# Altium PCB Game_Consol.PcbDoc
Units mil, origin at the board's own origin, x right, y up, seen from the top; angles counter-clockwise.
Board outline 3090.55 x 1732.28 mil, 2 copper layers (Top Layer, Bottom Layer); 54 components, 43 nets, 216 pads, 59 vias.
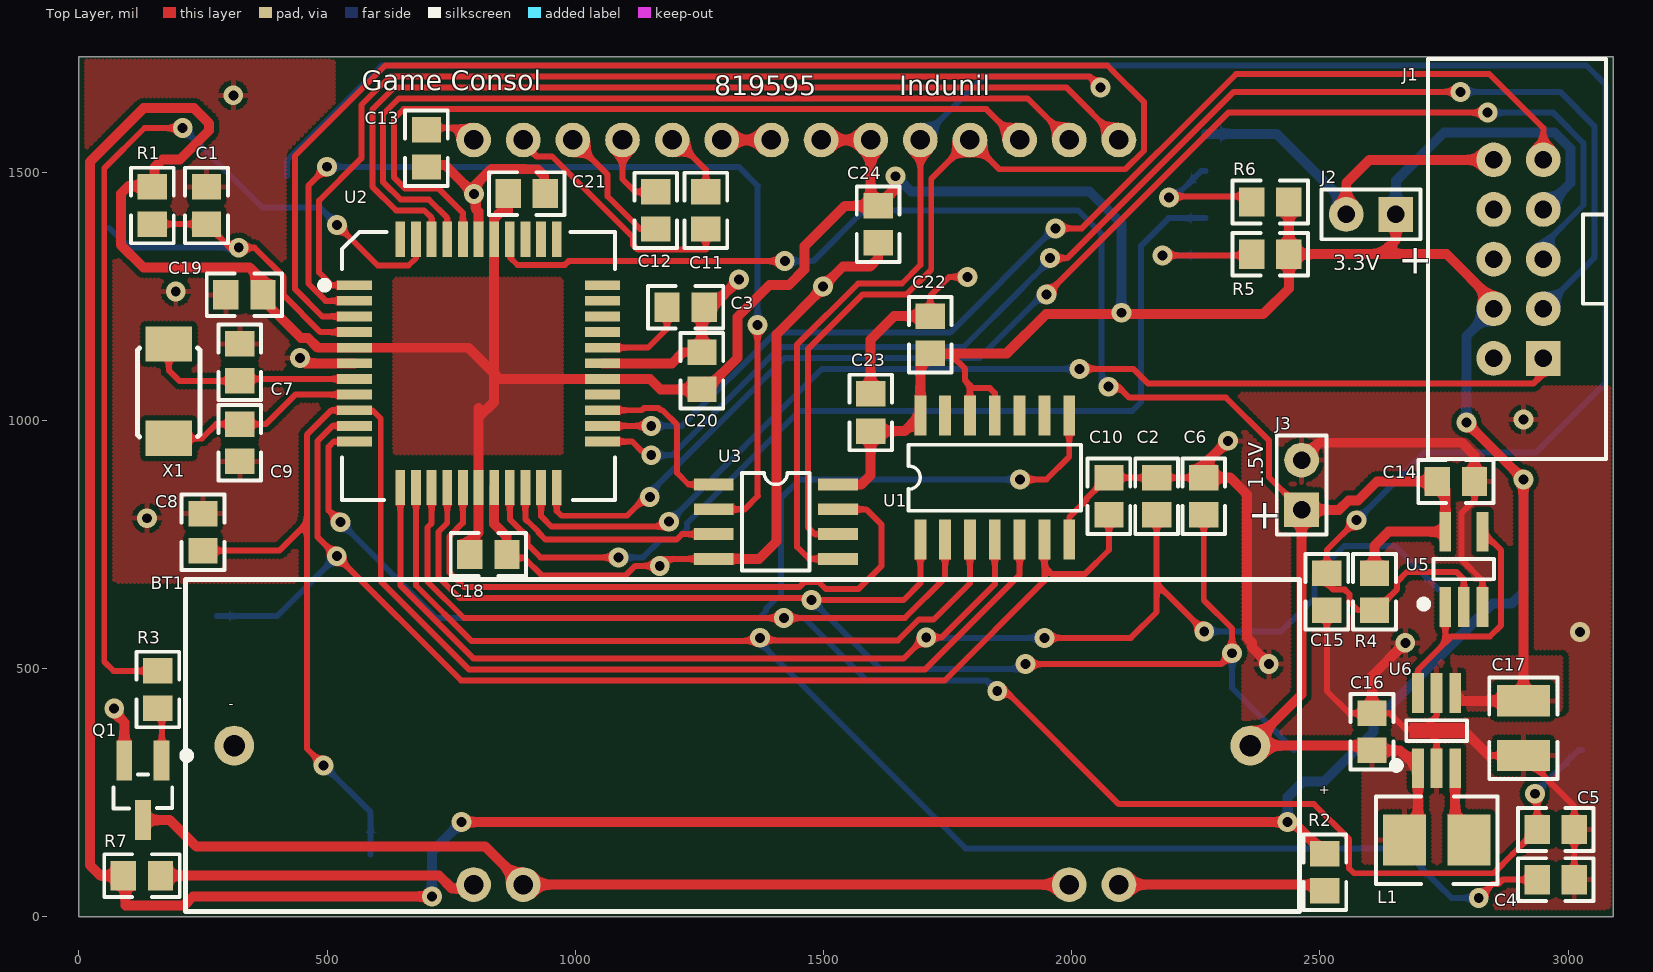
[diagram p0: Top Layer view]
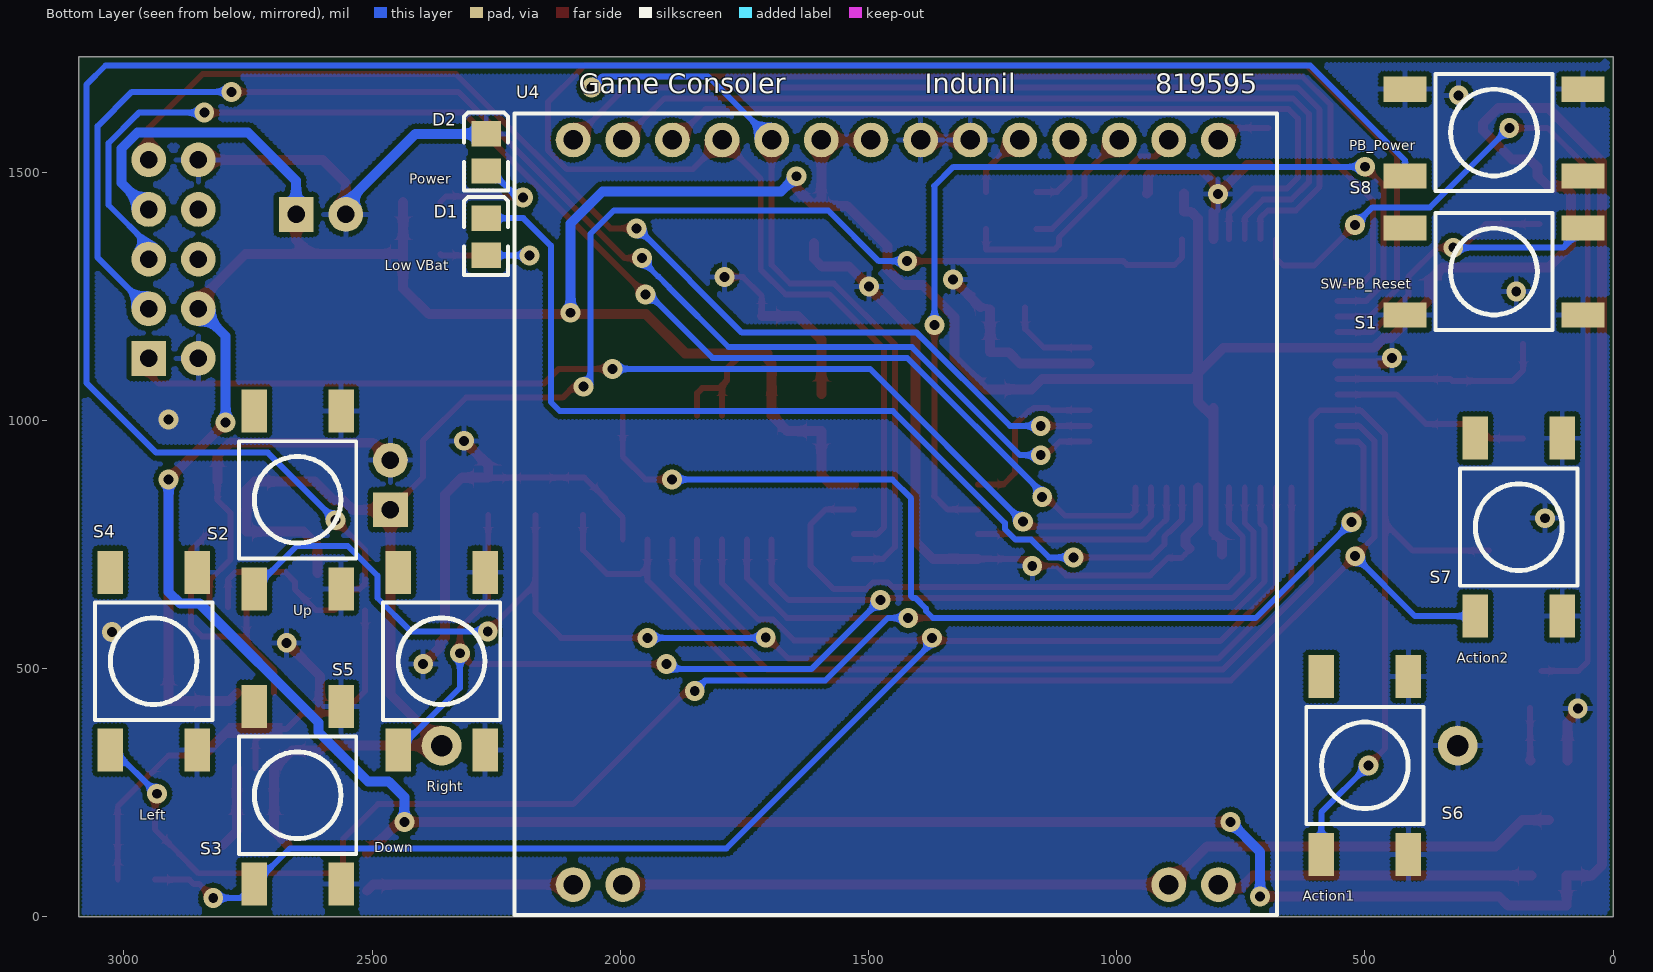
[diagram p1: Bottom Layer view, seen from below]
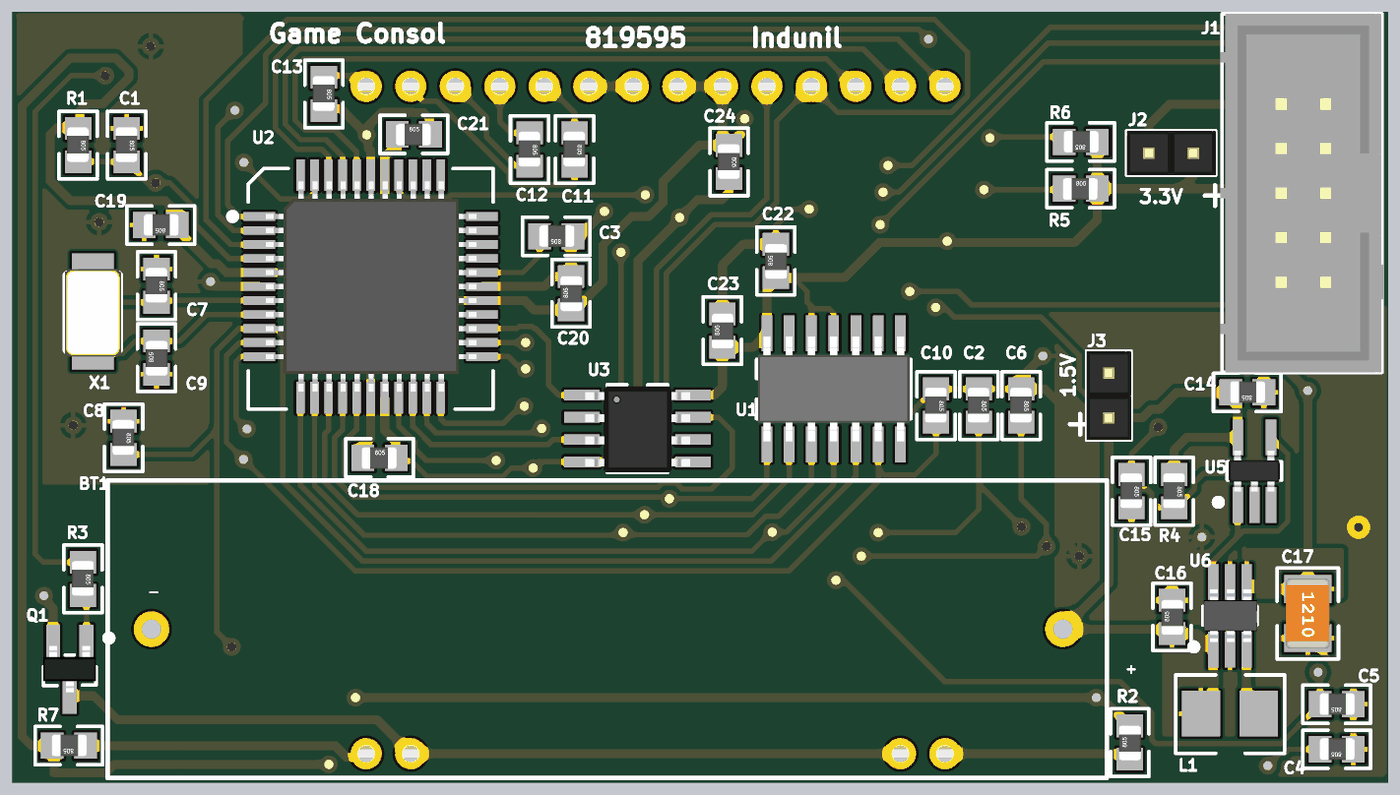
[diagram p2: 3D render of the assembled board from above, using the file's embedded part models]
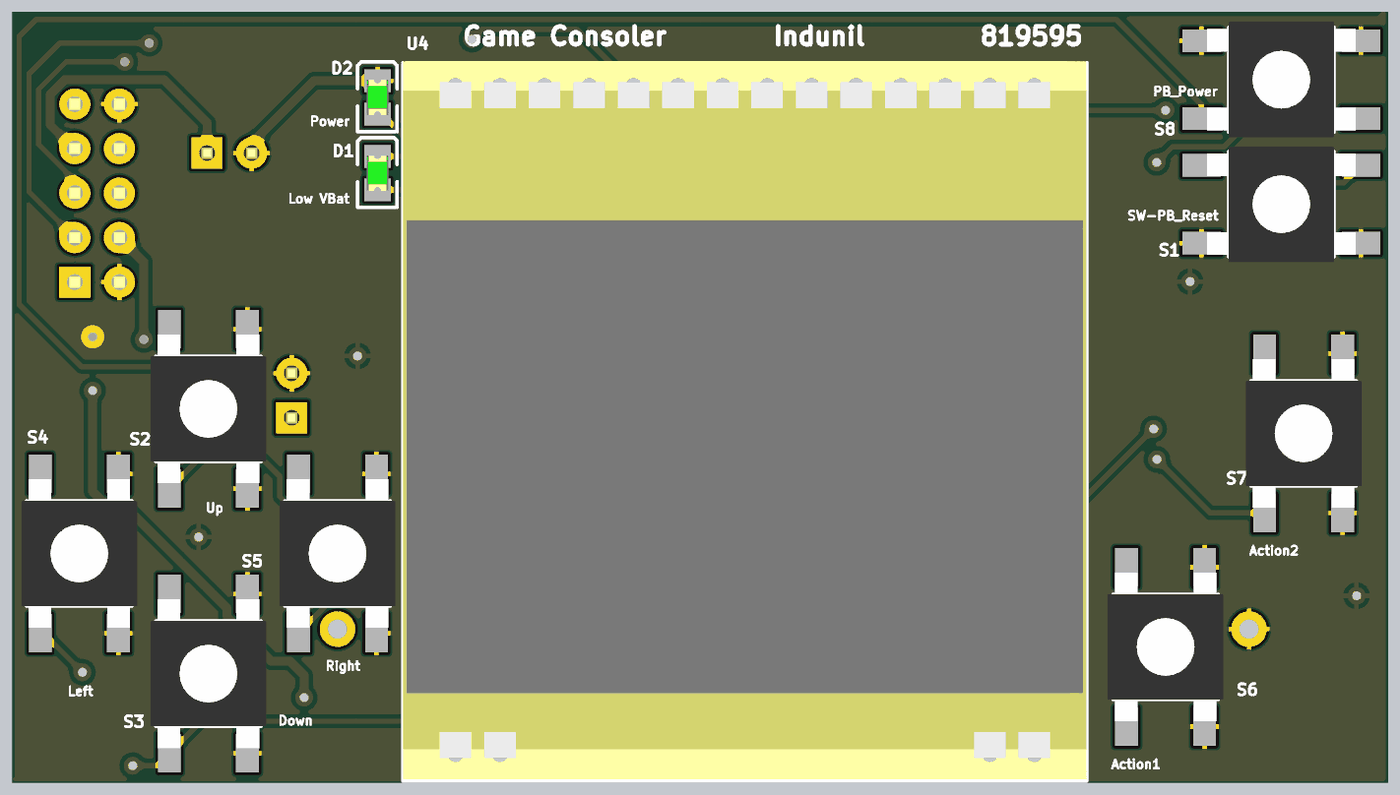
[diagram p3: 3D render of the assembled board from below, using the file's embedded part models]

## Layer stack, top to bottom
Top Solder: solder mask 0.4, Solder Resist, Dk 3.5
Top Layer: signal copper 1.4
Dielectric1: dielectric 12.6, FR-4, Dk 4.8
Bottom Layer: signal copper 1.4
Bottom Solder: solder mask 0.4, Solder Resist, Dk 3.5

## Board outline
0,0 0,1732.28 3090.55,1732.28 3090.55,0

## Design rules (kind name [scope] priority, off if disabled: settings)
Clearance [All] p1: gap=10 ignorepadtopadclearanceinfootprint=FALSE except(0: Arc-Hole Track-Hole SMDPad-Hole THPad-Hole Via-Hole Fill-Hole Poly-Hole Region-Hole Text-Hole)
ComponentClearance [All] p1 off: gap=10 collisioncheckmode=3 verticalgap=10 showdistances=FALSE
DiffPairsRouting [All] p1: maxlimit=20 minlimit=10 mostfreqgap=10 toplayer_minwidth=15 toplayer_maxwidth=15 toplayer_prefwidth=15 bottomlayer_minwidth=15 bottomlayer_maxwidth=15 bottomlayer_prefwidth=15 maxuncoupledlength=500
FabricationTestPointUsage TestPointUsage [All] p1: valid=0 allowmultiple=FALSE
FabricationTestpoint Testpoint [All] p1: side=3 testpointundercomponent=TRUE minsize=40 maxsize=100 preferedsize=60 minholesize=0 maxholesize=40 preferedholesize=32 testpointgrid=1 allowsidetop=TRUE allowsidebottom=TRUE usegrid=TRUE gridtolerance=0.01
Height [All] p1: minheight=0 maxheight=7874.02 prefheight=500
HoleSize [All] p1: absolutevalues=TRUE maxlimit=199 minlimit=15 maxpercent=80.000 minpercent=20.000
MinimumAnnularRing [All] p1: minimumring=5
PolygonConnect [All] p1: connectstyle=Relief reliefconductorwidth=10 reliefentries=4 polygonreliefangle="90 Angle" airgapwidth=10
RoutingVias [All] p1: holewidth=20 width=40 viastyle="Through Hole" minholewidth=15 minwidth=25 maxholewidth=80 maxwidth=100
SilkToSolderMaskClearance SilkscreenOverComponentPads [IsPad] p1: minsilkscreentomaskgap=10 clearancetoexposedcopper=TRUE
SolderMaskExpansion [All] p1: expansion=6
UnRoutedNet [All] p1: checkbadconnections=TRUE
Width WidthVcc [InNet('VCC 3.3V')] p1: maxlimit=20 minlimit=10 preferedwidth=20
Width [All] p2: maxlimit=20 minlimit=10 preferedwidth=12
22 further rules are at their usual default settings.

## Classes and differential pairs
component class Game_Consol_Top: C1 C2 C3 C4 C5 C6 C7 C8 C9 C10 C11 C12 C13 J1 Q1 R1 R2 R3 R7 S1 S2 S3 S4 S5 S6 S7 U1 U2 U3 U4 X1
component class Game_Consol_Power: BT1 C14 C15 C16 C17 C18 C19 C20 C21 C22 C23 C24 D1 D2 J2 J3 L1 R4 R5 R6 S8 U5 U6

## Components (designator, comment, footprint, x,y, rotation, side; value= is the part's Value field where it differs from the comment)
BT1 "Battery" BATT_HOLDER 1336.38,345 r0 top locked
C1 "100nF" 0805 257,1433 r270 top
C2 "100nF" 0805 2171,847.4 r270 top
C3 "100nF" 0805 1222,1228 r180 top
C4 "100nF" 0805 2975,75 r180 top
C5 "100nF" 0805 2975,176 r180 top
C6 "100nF" 0805 2266,847.4 r270 top
C7 "18pF" 0805 324,1117 r270 top
C8 "100nF" 0805 250,775 r270 top
C9 "18pF" 0805 324,955 r90 top
C10 "100nF" 0805 2075,847.4 r270 top
C11 "1uF" 0805 1263,1423 r270 top
C12 "1uF" 0805 1162,1423 r270 top
C13 "1uF" 0805 700,1548 r270 top
C14 "100nF" 0805 2774.02,877 r180 top
C15 "100nF" 0805 2514,655 r270 top
C16 "1uF" 0805 2605,372.6 r90 top
C17 "22uF" 1210 2910,380 r270 top
C18 "100nF" 0805 825,730 r0 top
C19 "100nF" 0805 333.4,1253 r180 top
C20 "100nF" 0805 1255,1100 r90 top
C21 "100nF" 0805 902,1457 r0 top
C22 "100nF" 0805 1715,1172.6 r90 top
C23 "100nF" 0805 1595,1016 r90 top
C24 "100nF" 0805 1610,1395 r270 top
D1 "Low VBat" 0805D 2270,1370 r270 bottom locked
D2 "Power" 0805D 2270,1540 r270 bottom locked
J1 "JTAG" BOXEDVERT10 2950,1125 r90 top locked
J2 "3.3V" HDR1X2 2653,1415 r180 top
J3 "1.5V" HDR1X2 2463,820 r90 top
L1 "4.7uH" 1210L 2735,155 r180 top
Q1 "RTR025N03TL" SOT23 129,255 r270 top
R1 "10k" 0805 148,1433 r270 top
R2 "15R" 0805 2510,90 r90 top
R3 "15R" 0805 159,458 r270 top
R4 "10k" 0805 2610,655 r270 top
R5 "1k" 0805 2400,1335 r0 top
R6 "1k" 0805 2400,1440 r180 top
R7 "15R" 0805 127,83 r180 top
S1 "SW-PB_Reset" SPNO_SMD 240,1300 r180 bottom locked
S2 "Up" SPNO_SMD 2649.99,840 r90 bottom locked
S3 "Down" SPNO_SMD 2649.99,245 r90 bottom locked
S4 "Left" SPNO_SMD 2939.99,515 r90 bottom locked
S5 "Right" SPNO_SMD 2359.99,515 r90 bottom locked
S6 "Action1" SPNO_SMD 499.99,305 r90 bottom locked
S7 "Action2" SPNO_SMD 189.99,785 r90 bottom locked
S8 "PB_Power" SPNO_SMD 240,1580 r0 bottom locked
U1 "74AHC30" SOIC-14 1845,885 r90 top
U2 "ATMEGA16" QFP-48 805,1115 r0 top locked
U3 "FM25L04B" SOIC-8 1404,796 r0 top
U4 "EA DOGS102x-6" "EA DOGS102x" 1445,815 r180 bottom locked
U5 "74AUG1G80" SOT23-5 2790,700 r90 top
U6 "SC120" SOT23-6 2735,375 r90 top
X1 "7.68Mhz" XTAL_FLAT_SMD 181,1059 r90 top

## Footprints (in the part's own frame and the unit in brackets; to place one, negate y for a bottom-side part, rotate by r counter-clockwise, add the part's x,y. Pads: shape width x height; smd on the part's side, far side on the other; paste and mask are expansions set on the pad)
0805 [mm] "0805 Footprint"
  rect 1.3x1.5 smd: 1(-0.95,0) 2(0.95,0)
  silkscreen extent -1.93,-1.09 1.93,1.09, body extent -1.03,-0.64 0.97,0.61, height 0.8
0805D [mm] "0805 Diode"
  rect 1.3x1.5 smd: A(0.95,0) K(-0.95,0)
  silkscreen extent -2.03,-1.14 1.95,1.12, body extent -1.01,-0.62 1.01,0.63, height 1.1
1210 [mm]
  rect 1.6x2.7 smd: 1(-1.4,0) 2(1.4,0)
  silkscreen extent -2.6,-1.75 2.6,1.75, body extent -2,-1.24 2,1.24, height 1.72
1210L [mm] "Precision Wire Wound Inductor, 2-Leads, Body 3.2x3.2mm, IPC Low Density"
  rect 2.2x2.6 smd: 1(-1.651,0) 2(1.651,0)
  silkscreen extent -3.12,-2.21 3.1,2.26, body extent -1.75,-1.75 1.75,1.75, height 2.2
BATT_HOLDER [mil]
  round 80 hole 43.31: 1(1023.62,0) 2(-1023.62,0)
  silkscreen extent -1122,-335 1122,335
BOXEDVERT10 [mil] "IDC Header 2.54mm Boxed 10 pins"
  rect 70x70 hole 35.43: 1(0,0)
  round 70 hole 35.43: 2(0,100) 3(100,0) 4(100,100) 5(200,0) 6(200,100) 7(300,0) 8(300,100) 9(400,0) 10(400,100)
  silkscreen extent -203,-127 603,232, body extent -204,-129 604,237, height 359
"EA DOGS102x" [mil] "graphics display footprint"
  round 70 hole 39.37: 1(-650,-750) 2(-550,-750) 13(550,-750) 14(650,-750) 15(650,750) 16(550,750) 17(450,750) 18(350,750) 19(250,750) 20(150,750) 21(50,750) 22(-50,750) 23(-150,750) 24(-250,750) 25(-350,750) 26(-450,750) 27(-550,750) 28(-650,750)
  silkscreen extent -768,-811 768,803, body extent -768,-807 768,807, height 213
HDR1X2 [mil] "Connector; Header; 2 Position"
  rect 70x70 hole 35.43: 1(0,0)
  round 70 hole 35.43: 2(100,0)
  silkscreen extent -50,-50 150,50, body extent -50,-50 150,50, height 333
QFP-48 [mm]
  rect 1.8x0.5 smd: 1(-6.35,4) 2(-6.35,3.2) 3(-6.35,2.4) 4(-6.35,1.6) 5(-6.35,0.8) 6(-6.35,0) 7(-6.35,-0.8) 8(-6.35,-1.6) 9(-6.35,-2.4) 10(-6.35,-3.2) 11(-6.35,-4) 23(6.35,-4) 24(6.35,-3.2) 25(6.35,-2.4) 26(6.35,-1.6) 27(6.35,-0.8) 28(6.35,0) 29(6.35,0.8) 30(6.35,1.6) 31(6.35,2.4) 32(6.35,3.2) 33(6.35,4)
  rect 0.5x1.8 smd: 12(-4,-6.35) 13(-3.2,-6.35) 14(-2.4,-6.35) 15(-1.6,-6.35) 16(-0.8,-6.35) 17(0,-6.35) 18(0.8,-6.35) 19(1.6,-6.35) 20(2.4,-6.35) 21(3.2,-6.35) 22(4,-6.35) 34(4,6.35) 35(3.2,6.35) 36(2.4,6.35) 37(1.6,6.35) 38(0.8,6.35) 39(0,6.35) 40(-0.8,6.35) 41(-1.6,6.35) 42(-2.4,6.35) 43(-3.2,6.35) 44(-4,6.35)
  silkscreen extent -8,-6.98 6.98,6.73, body extent -5.97,-6 6.03,6, height 1.13
SOIC-8 [mil] "SOIC-8 Footprint"
  rect 80x24 smd: 1(-125,75) 2(-125,25) 3(-125,-25) 4(-125,-75) 5(125,-75) 6(125,-25) 7(125,25) 8(125,75)
  silkscreen extent -68,-98 68,98, body extent -117,-98 119,94, height 67
SOIC-14 [mil] "SOIC-14 Footprint"
  rect 80x24 smd: 1(-125,150) 2(-125,100) 3(-125,50) 4(-125,0) 5(-125,-50) 6(-125,-100) 7(-125,-150)
  rect 80x24.02 smd: 8(125,-150) 9(125,-100) 10(125,-50) 11(125,0) 12(125,50) 13(125,100) 14(125,150)
  silkscreen extent -67,-173 66,173, body extent -118,-170 118,170, height 61
SOT23 [mil] "SOT23, 3-Leads, Body 3.0x2.5mm (max), Pitch 0.95mm, IPC Low Density"
  rect 80.24x31.5 smd: 1(-60,37.4)
  rect 80x31.5 smd: 2(-60,-37.4) 3(60,0)
  silkscreen extent -75,-59 37,93, body extent -52,-59 52,59, height 43
SOT23-5 [mm]
  rect 2.032x0.6 smd: 1(-1.929,0.95) 2(-1.929,0) 3(-1.929,-0.95) 4(1.929,-0.95) 5(1.929,0.95)
  silkscreen extent -1.9,-1.55 0.53,2.18, body extent -1.17,-1.46 1.17,1.46, height 1.02
SOT23-6 [mm]
  rect 2.032x0.6 smd: 1(-1.929,0.95) 2(-1.929,0) 3(-1.929,-0.95) 4(1.929,-0.95) 5(1.929,0) 6(1.929,0.95)
  silkscreen extent -1.9,-1.55 0.53,2.18, body extent -1.5,-1.56 1.5,1.49, height 1.42
SPNO_SMD [mm] "SP NO SMD Tactile switch"
  rect 2.2x1.3 smd: 1(-4.55,-2.225) 2(4.55,-2.225) 3(-4.55,2.225) 4(4.55,2.225)
  silkscreen extent -3,-3 3,3, body extent -4.25,-3.3 4.25,3.3, height 4.32
XTAL_FLAT_SMD [mm]
  rect 1.8x2.4 smd: 1(-2.412,0) 2(2.412,0)
  silkscreen extent -2.33,-1.59 2.21,1.6, body extent -2.58,-1.6 2.42,1.6, height 1.02

## Part data
BT1: "Multicell Battery", LatestRevisionDate=17-Jul-2002, LatestRevisionNote="Re-released for DXP Platform.", PackageDescription="Battery; 2 Leads", PackageReference=BAT-2, Published=24-Mar-1999, Publisher="Altium Limited"
C1 C2 C3 C4 C5 C6 C7 C8 C9 C10 C11 C12 C13 C14 C15 C16 C18 C19 C20 C21 C22 C23 C24: library part "C 0805", "Capacitor 100nF", Class I=Passive, Revision="July-2002: Re-released for DXP Platform."
C17: library part "C 1210", "Capacitor 22uF", Capacitance=22µF, Manufacturer="Generic Components", Manufacturer Part Number=LMK316F226ZL-T, Operating Temperature="-30°C ~ 85°C", Package / Case="1206 (3216 Metric)", Ratings=-, Supplier Part Number 1=587-1356-1-ND, Temperature Coefficient="Y5V (F)", Tolerance="-20%, +80%", Voltage - Rated=10V, Applications="General Purpose", Category=Capacitors, Class I=Passive, Class II=Capacitor, ComponentLink1Description=http://www.yuden.co.jp/or/product/category/capacitor/LMK316F226ZL-T.pdf, ComponentLink1URL=http://www.yuden.co.jp/or/product/category/capacitor/LMK316F226ZL-T.pdf, Features=-, Height - Seated (Max)=-, Lead Spacing=-, Lead Style=-, Mounting Type="Surface Mount, MLCC", Packaging="Cut Tape (CT)", Pricing 1="1=0.3, 10=0.254, 50=0.143, 100=0.1271, 250=0.09532, 500=0.08418, 1000=0.07465 (AUD)", Published=8-Jun-2000, Publisher="Altium Limited", Revision="July-2002: Re-released for DXP Platform.", RoHS="RoHS Compliant", Size / Dimension="0.126\" L x 0.063\" W (3.20mm x 1.60mm)", Stock 1=33004, Supplier 1=Digi-Key, Thickness (Max)="0.071\" (1.80mm)"
D1: library part "LED RED", "Light Emitting Diode", Manufacturer="Generic Components", Class I=Discrete, Class II="Diode - Switching", Published=8-Jun-2000, Publisher="Altium Limited", Revision="July-2002: Re-released for DXP Platform."
D2: library part "LED GREEN", "Light Emitting Diode", Manufacturer="Generic Components", Class I=Discrete, Class II="Diode - Switching", Published=8-Jun-2000, Publisher="Altium Limited", Revision="July-2002: Re-released for DXP Platform."
J1: library part JTAG_CON, "JTAG ATMEL connector"
J2 J3: library part HDR2, "2 Pin Header", LatestRevisionDate=17-Jul-2002, LatestRevisionNote="Re-released for DXP Platform.", Publisher="Altium Limited"
L1: library part "I 1210", "Inductor 4.7uH", Current=450mA, Current - Saturation=-, DC Resistance (DCR)="260 mOhm Max", Frequency - Self Resonant=43MHz, Frequency - Test=1MHz, Inductance=4.7µH, Manufacturer="Murata Electronics North America", Manufacturer Part Number=LQH32CN4R7M23L, Operating Temperature="-40°C ~ 85°C", Package / Case="1210 (3225 Metric)", Supplier Part Number 1=490-2495-1-ND, Tolerance=±20%, Applications="Power Supplies", Category="Inductors, Coils, Chokes", Class II=Inductor, Code_IEC=1005, Code_JEITA=0402, ComponentLink1Description=http://search.murata.co.jp/Ceramy/image/img/PDF/ENG/L0075S0093LQH32C_23~33.pdf, ComponentLink1URL=http://search.murata.co.jp/Ceramy/image/img/PDF/ENG/L0075S0093LQH32C_23~33.pdf, Current - Temperature Rise=-, LatestRevisionDate=17-Jul-2002, LatestRevisionNote="Re-released for DXP Platform.", Material - Core=Ferrite, Mounting Type="Surface Mount", PackageReference=0402-A, Packaging="Cut Tape (CT)", Pricing 1="1=0.34, 10=0.313, 25=0.2784, 50=0.2436, 100=0.2261, 250=0.20868, 500=0.19824, 750=0.18084, 1000=0.15998 (AUD)", Published=8-Jun-2000, Publisher="Altium Limited", Q @ Freq=-, RoHS="RoHS Compliant", Shielding=Unshielded, Stock 1=31057, Supplier 1=Digi-Key, Type="Ferrite Core"
Q1: library part MOSFET-N, "N-Channel MOSFET", PackageDocument=1995/1996, LatestRevisionDate=17-Jul-2002, LatestRevisionNote="Re-released for DXP Platform.", PackageReference=E3, Published=8-Jun-2000, Publisher="Altium Limited"
R1 R2 R3 R4 R5 R6 R7: library part R, "Resistor"
S1 S2 S3 S4 S5 S6 S7 S8: library part SW-PB, "Push Button Switch", Contact Rating @ Voltage="0.05A @ 12VDC", Manufacturer="TE Connectivity", Manufacturer Part Number=FSM4JSMA, Operating Force=160gf, Supplier Part Number 1=450-1129-ND, Actuator Orientation="Top Actuated", Actuator Type=Standard, Category=Switches, Circuit=SPST-NO, ComponentLink1Description=http://documents.tycoelectronics.com/commerce/DocumentDelivery/DDEController?Action=srchrtrv&DocNm=2-1437565-7&DocType=CD&DocLang=EN, ComponentLink1URL=http://documents.tycoelectronics.com/commerce/DocumentDelivery/DDEController?Action=srchrtrv&DocNm=2-1437565-7&DocType=CD&DocLang=EN, Illumination=Non-Illuminated, LatestRevisionDate=17-Jul-2002, LatestRevisionNote="Re-released for DXP Platform.", Mounting Type="Surface Mount", Outline="6.00mm x 6.00mm", PackageDescription="Switch; 2 Leads", PackageReference=SPST-2, Packaging=Bulk, Pricing 1="1=0.28, 10=0.265, 25=0.2256, 50=0.1974, 100=0.1834, 250=0.1622, 500=0.15516, 1000=0.12694, 5000=0.10579 (AUD)", Published=24-Mar-1999, Publisher="Altium Limited", RoHS="RoHS Compliant", Stock 1=30338, Supplier 1=Digi-Key, Switch Function=Off-Mom, Termination Style="Gull Wing"
U1: "1 x 8 Input NAND gate"
U2: "ATMEGA16 Microcontroller"
U3: "FRAM 4Kb Memory"
U4: "LCD 102x64-pixel with backlight"
U5: "Inverted single D flip flop"
U6: "Regulator Low Voltage"
X1: library part XTAL, "Crystal Oscillator", Digikey=535-9103-1-ND, Revision="July-2002: Re-released for DXP Platform."

## Via types
v1: diameter 40, hole 20, Top Layer to Bottom Layer, tented both sides, 57 vias
v2: diameter 40, hole 20, Top Layer to Bottom Layer, 2 vias

## Nets (pads, with @x,y where several pads share a name; then routed paths per layer and width w, separated by ;. In a path a pad name is that pad's centre, name@x,y a point inside that pad or via, vN(x,y) a via of type N, cw(c..) or ccw(c..) an arc to the next point about the centre after c; other vN are vias at no path point)
BackLED: R3.1 U2.43 | length 1915.8
  Top Layer w12: R3.1@144.4,495.4 69.6,495.4 51.01,513.99 51.01,1508.01 132.01,1589.01 v1(209,1589.01) ; v1(520,1394) 602,1312 664,1312 679.02,1327.02 U2.43
  Bottom Layer w12: v1(209,1589.01) 369.01,1429 369.2,1429.19 484.81,1429.19 v1(520,1394)
C1-: Q1.3 U4.2 U4.13 | length 1919.8
  Top Layer w20: Q1.3 183,195 236.47,141.53 818.47,141.53 U4.13 U4.2
CD: U2.40 U4.26 | length 1654.3
  Top Layer w12: U2.40 773.5,1418.08 724.59,1467 657.23,1467 635,1489.23 635,1608.15 653.85,1626.99 1828.01,1626.99 1880,1575 1895,1575 U4.26
  Bottom Layer w12: U4.26@1895,1550 U4.26
CS0_LCD: U2.42 U4.28 | length 1910.4
  Top Layer w12: U2.42 710.51,1407.99 695.5,1423 639,1423 591,1471 591,1626.37 635.62,1670.99 1989.01,1670.99 U4.28
CS1_RAM: U2.25 U3.1 | length 346.5
  Top Layer w12: U2.25 1133.57,1020.51 1138.07,1025.02 1167.9,1025.02 1172.4,1020.51 1175.49,1020.51 1205,991 1205,894 1228,871 U3.1
GND: BT1.2 C1.1 C2.1 C3.1 C4.1 C5.1 C6.1 C7.1 C8.1 C9.1 C10.1 C13.2 C14.1 C15.2 C16.2 C17.2 C18.2 C19.2 C20.2 C21.2 C22.2 C23.2 C24.2 D2.K J1.2 J1.10 J2.2 J3.2 Q1.2 S1.1 S1.2 S2.1 S2.2 S3.1 S3.2 S4.1 S4.2 S5.1 S5.2 S6.1 S6.2 S7.1 S7.2 S8.1 S8.2 U1.7 U2.6 U2.18 U2.28 U2.39 U3.4 U4.20 U4.21 U5.3 U6.2 U6.5 | length 6621.7
  Top Layer w12: C18.2@853,742 853,739.4 C18.2 869.4,723 897,723 932,688 1101.91,688 1120.91,707 v1(1170,707) 1184,721 U3.4 ; C3.1@1255,1223.6 C3.1 C3.1@1274,1228 ; C22.2 1715,1251 1753,1289 v1(1790,1289) ; U1.7 1995,804.8 2029.47,839.28 2029.47,842.22 2072.06,884.8 C10.1 C2.1 C6.1 ; C15.2 2514,455 2559,410 C16.2 2641,410 2673,378 2708,378 2710,380 ; U6.2 2735,355 2710,380 ; U6.5 2735,405 2710,380 ; 2785,380 2710,380 ; C14.1 2811.42,839.42 2785,813 2785,720 2827.4,677.6 U5.3 ; 2840.12,324.88 C17.2 3012.4,222.48 C5.1 C4.1
  Top Layer w20: v1(71,420) 67,416 91.6,391.4 Q1.2 ; v1(445,1126) 456,1115 U2.6 ; C13.2@694,1514.6 737.4,1514.6 v1(796,1456) ; U2.39 805,1420.5 799.5,1425.99 799.5,1458.5 797.01,1456 v1(796,1456) ; U2.18 836.5,791.5 861,767 861,750 C18.2@853,742 ; C21.2 937,1459.4 937,1493 924,1506 899,1506 898.47,1506.53 830.72,1506.53 796,1471.8 v1(796,1456) ; U2.28 1194.6,1115 1217,1137.4 C20.2 C3.1@1255,1223.6 ; C3.1@1274,1228 v1(1330,1284) ; U3.4 1370,721 1405,756 1405,1173.43 1499,1267.43 v1(1499,1270) 1539,1310 1594,1310 1610,1326 C24.2 ; U4.20 U4.21 ; C23.2 1595,1163 1642,1210 C22.2 ; v1(2315,959) 2266,910 C6.1 2319.2,884.8 2353,851 2353,562.29 2363,552.29 2363,543 v1(2397,509) ; J3.2 2498,955 2786,955 2811.42,929.58 C14.1 ; J2.2@2575,1415 2553,1437 2553,1478 2600,1525 J1.10 ; C16.2 2605,485 v1(2672,552) ; 2785,380 2840.12,324.88
  Bottom Layer w20: D2.K 2412.6,1577.4 2553,1437 J2.2
  other v1: 137,803 195,1260 311,1655
  other v2: 3024,574 2910,1002
Hold: U2.16 U3.7 | length 1279.1
  Top Layer w12: U2.16 773.5,793.65 746.01,766.15 746.01,693.85 775.85,664 1451.09,664 1461.09,674 1490.91,674 1504.91,660 1570,660 1617,707 1617,790 1586,821 U3.7
LED_LP: D1.K U2.19 | length 1981.9
  Top Layer w12: U2.19 867.99,800.9 893.36,775.53 894.62,775.53 903.99,766.15 903.99,750.01 930,724 v1(1087,724)
  Bottom Layer w12: v1(1087,724) 1136.09,724 1172.09,760 1203.91,760 1225,781.09 1225,793 1451,1019 2121.91,1019 2140,1037.09 2140,1352 2195.4,1407.4 D1.K
MISO: U2.2 U3.2 | length 1967.4
  Top Layer w12: v1(500,1511) 462,1473 462,1276 497.02,1240.98 U2.2 ; U3.2 1341,821 1368,848 1367,849 v1(1367,1192)
  Bottom Layer w12: v1(500,1511) 1329,1511 1368,1472 1367,1471 v1(1367,1192)
NetC3_2: C3.2 U2.29 | length 188.8
  Top Layer w12: U2.29 1146.5,1146.5 1184.6,1184.6 C3.2
NetC11_1: C11.1 U4.19 | length 137.5
  Top Layer w12: U4.19 1203,1565 1263,1505 C11.1
NetC11_2: C11.2 U4.16 | length 513.5
  Top Layer w12: U4.16 895,1559 922,1532 953,1532 1116.47,1368.53 1116.47,1353.38 1125.84,1344.01 1263,1344.01 C11.2
NetC12_1: C12.1 U4.18 | length 156.6
  Top Layer w12: U4.18 1095,1486 1120.6,1460.4 C12.1
NetC12_2: C12.2 U4.17 | length 267
  Top Layer w12: U4.17 1065,1495 1065,1451.11 1130.51,1385.6 C12.2
NetC13_1: C13.1 U4.15 | length 111.1
  Top Layer w12: C13.1@694,1589.4 770.6,1589.4 U4.15
NetC15_1: C15.1 R4.2 S8.4 U5.2 | length 4562
  Top Layer w12: v1(2574,799) 2514,739 C15.1 2514,672 2526.81,659.19 2550.16,659.19 2559.53,649.82 2559.53,634.47 2576.4,617.6 R4.2 2612.94,617.6 2655.53,660.18 2655.53,675 2675.53,695 2775,695 2790,680 U5.2
  Bottom Layer w12: S8.4 419.13,1524.13 610,1715 3037,1715 3075,1677 3075,1075 2935,935 2710,935 v1(2574,799)
NetD1_A: D1.A R5.1 | length 268.4
  Top Layer w12: v1(2182.6,1332.6) 2360.2,1332.6 R5.1
  Bottom Layer w12: v1(2182.6,1332.6) D1.A
NetD2_A: D2.A R6.2 | length 275
  Top Layer w12: v1@2192.4,1455 v1@2196,1451.4 ; v1(2196,1449) v1@2196,1451.4 ; R6.2 2351.2,1451.4 v1@2196,1451.4
  Bottom Layer w12: v1(2196,1449) 2207,1449 2260.6,1502.6 D2.A
NetL1_1: L1.1 U6.3 | length 165.5
  Top Layer w20: U6.3 2772.4,172.6 L1.1@2800,145
NetQ1_1: Q1.1 R3.2 | length 105.8
  Top Layer w12: Q1.1@167,315.6 R3.2@167,420.6
  Top Layer w20: Q1.1 Q1.1@167,315.6
NetR2_1: R2.1 U4.1 | length 420.1
  Top Layer w20: U4.1 2497.6,65 R2.1
NetR7_1: R7.1 U4.14 | length 645
  Top Layer w20: R7.1 725.57,83 751,57.57 751,57 787,57 U4.14
NetU5_1: U5.1 U5.4 U6.6 | length 526.9
  Top Layer w12: U6.6 2697.6,497.6 2752.6,552.6 ; U5.1 2752.6,552.6 ; U5.4 2865,738.33 2865,587.23 2842.77,565 2765,565 2752.6,552.6
PB_Action1: C8.2 S6.3 U1.5 U2.9 | length 3145.4
  Top Layer w12: C8.2 403.6,737.6 459,793 ; v1(493,305) 459,339 459,793 ; U1.5 1895,688.89 1704.11,498 786.29,498 608,676.29 608,1003.92 591.41,1020.51 U2.9 508.51,1020.51 459,971 459,793
  Bottom Layer w12: v1(493,305) 587.59,210.41 S6.3
PB_Action2: C10.2 S7.3 U1.6 U2.10 | length 2549
  Top Layer w12: U2.10 511.02,989.02 481,959 481,765 v1(519.5,726.5) 770,476 1744,476 1945,677 1945,705 ; U1.6 1945,705 ; C10.2 2075,739 2027,691 1959,691 1945,705
  Bottom Layer w12: S7.3 398.87,605.87 v1(519.5,726.5)
PB_Down: C4.2 S3.3 U1.3 U2.13 | length 3320.2
  Top Layer w12: U2.13 679.02,667.5 790.51,556 1365.91,556 v1@1366.96,557.04 ; v1(1372,562.09) v1@1366.96,557.04 ; U1.3 1795,672 1721.96,598.96 1721.91,599 1692.09,599 1650.13,557.04 v1@1366.96,557.04 ; v1(2820,38) 2847.82,65.82 2859.05,65.82 2868.23,75 C4.2
  Bottom Layer w12: v1@1359,563 1359.91,562.09 v1(1372,562.09) 1372,552 1786,138 2665.46,138 S3.3 2765.46,38 v1(2820,38)
PB_Int0: U1.8 U2.11 | length 2102.1
  Top Layer w12: v1(527,795) 503,819 503,947 513.52,957.52 U2.11 ; v1(1896,881) 1949,881 1995,927 U1.8
  Bottom Layer w12: v1(527,795) 720,602 1370,602 1384,616 1384,620.91 1405.09,642 1410,642 1414,646 1414,843 1452,881 v1(1896,881)
PB_Left: C5.2 S4.3 U1.2 U2.14 | length 3384.4
  Top Layer w12: U2.14 710.51,792.88 702.01,784.38 702.01,675.62 775.63,602 v1(1420,602) 1663.98,602 1745,683.02 U1.2 ; v1(1850,455) 1867,455 2095,227 2488.15,227 2559,156.15 2559,97.37 2568.55,87.82 2849.93,87.82 2888.59,126.47 2888.07,126.47 C5.2 2937.6,243.4 v1(2933,248)
  Bottom Layer w12: v1(1420,602) 1461.09,602 1587.09,476 1829,476 v1(1850,455) ; v1(2933,248) 3020.87,335.87 S4.3
PB_Reset: C1.2 R1.2 S1.4 U2.4 | length 796.5
  Top Layer w12: R1.2 C1.2 304.6,1348 v1(322,1348) 353.55,1348 412.39,1289.16 412.39,1251.94 486.35,1177.99 U2.4
  Bottom Layer w12: S1.4 100.46,1348 v1(322,1348)
PB_Right: C6.2 S5.3 U1.1 U2.15 | length 2747.3
  Top Layer w12: U2.15 742.01,793.27 724.01,775.27 724.01,684.73 766.74,642 1472,642 v1(1476,638) 1661,638 1695,672 U1.1 ; v1(1907,509) 2301,509 v1(2323,531) 2323,581 2266,638 C6.2
  Bottom Layer w12: v1(1476,638) 1615,499 1897,499 v1(1907,509) ; v1(2323,531) 2323,461.2 2447.59,336.6 S5.3
PB_Up: C2.2 S2.3 U1.4 U2.12 | length 3030.8
  Top Layer w12: U2.12 647.52,667.88 795.4,520 1661,520 v1@1707,566 ; v1(1707,563) 1738,563 1845,670 U1.4 ; v1(1945,562) 2119,562 2171,614 2171,671 ; C2.2 2171,671 ; v1(2267,575) 2171,671
  Bottom Layer w12: v1(1707,563) 1708,562 v1(1945,562) ; v1(2267,575) 2422,575 2489.18,642.18 2489.18,687.18 2549,747 2651.46,747 S2.3
RST_LCD: U2.41 U4.27 | length 1769
  Top Layer w12: U2.41 742.01,1407.99 705,1445 648.11,1445 613,1480.11 613,1617.26 644.73,1648.99 1911.01,1648.99 U4.27
SCK: U2.3 U3.6 U4.25 | length 3749.2
  Top Layer w12: U2.3 490.51,1209.49 435,1265 435,1532.6 617.39,1714.99 2071.99,1714.99 2083.98,1703 2146,1641 2146,1543.88 2108.12,1506 1854,1506 U4.25 1717,1487 1717,1303.89 1667.11,1253.99 1578.84,1253.99 1469,1144.15 1469,784 1482,771 U3.6
SDA: U2.1 U3.5 U4.24 | length 3467.7
  Top Layer w12: U2.1 509.52,1272.48 484,1298 484,1443 569,1528 569,1635.49 626.51,1692.99 2036.01,1692.99 v1(2058,1671) ; U3.5 1471,721 1447,745 1447,1153.26 1569.73,1275.99 1657.99,1275.99 1695,1313 U4.24
  Bottom Layer w12: U4.24 1823,1693 2036,1693 v1(2058,1671)
TCK: J1.1 U2.21 | length 2274
  Top Layer w12: U2.21 930.98,807.02 952,786 1179,786 v1(1189,796) ; v1@2011.12,1103.88 v1(2016,1103.88) 2016.12,1104 2124,1104 2154,1074 2930,1074 2950,1094 J1.1
  Bottom Layer w12: v1(1189,796) 1496.88,1103.88 v1(2016,1103.88)
TDI: J1.9 U2.24 | length 2297.9
  Top Layer w12: U2.24 v1(1152.98,989.02) ; v1(1967,1387) 2020.24,1387 2331.24,1698 2841.09,1698 2950,1589.09 J1.9
  Bottom Layer w12: v1(1152.98,989.02) 1214.93,989.02 1402.91,1177 1755.09,1177 1965.09,1387 v1(1967,1387)
TDO: J1.3 U2.23 | length 2755.3
  Top Layer w12: U2.23 1114.48,957.52 1134,938 1145,938 v1(1153,930) ; v1(1956,1327) 1991.35,1327 2326.35,1662 v1(2783,1662)
  Bottom Layer w12: v1(1153,930) 1194.89,930 1412.76,1147.88 1781.88,1147.88 1902,1268 1902,1268.91 1923.09,1290 1924,1290 1956,1322 v1(1956,1327) ; v1(2783,1662) 2984,1662 3053,1593 3053,1328 J1.3
TMS: J1.5 U2.22 | length 2753.8
  Top Layer w12: U2.22 962.48,817.52 972,808 1104,808 1142,846 v1(1150,846) ; v1(1949.46,1254) 2315.46,1620 v1(2838,1620)
  Bottom Layer w12: v1(1150,846) 1150,854 1421.88,1125.88 1813.88,1125.88 1942,1254 v1(1949.46,1254) ; v1(2838,1620) 2970,1620 2974,1616 2974,1615.55 3031,1558.55 3031,1433.88 2950,1352.88 J1.5
VBat: BT1.1 C14.2 C16.1 J3.1 L1.2 R4.1 U2.37 U5.5 U6.1 | length 3802.8
  Top Layer w12: U2.37 867.99,1328.59 883.59,1313 884.15,1313.57 978.95,1313.57 986.38,1321 v1(1422,1321) ; v1(2074,1068) 2094,1068 2116,1046 2310.91,1046 2397,959.91 2397,886 J3.1
  Top Layer w20: R4.1 2610,747.4 2638.53,775.93 U5.5 2752.6,861.02 C14.2 2615,877 2577,839 2557.43,839 2538.43,820 J3.1 2463,448 BT1.1 2595.2,345 C16.1 2661.47,335.2 U6.1 2697.6,172.6 L1.2@2670,145
  Bottom Layer w12: v1(1422,1321) 1479,1321 1581,1423 2013,1423 2060,1376 2060,1082 v1(2074,1068)
"VCC 3.3V": C17.1 C18.1 C19.1 C20.1 C21.1 C22.1 C23.1 C24.1 J1.4 J1.7 J2.1 R1.1 R2.2 R5.2 R6.1 R7.2 U1.11 U1.12 U1.14 U2.5 U2.17 U2.27 U2.38 U3.8 U4.22 U4.23 U6.4 | length 13248.2
  Top Layer w12: C22.1@1703.8,1135.2 1709.4,1129.6 1759.4,1129.6 1785.2,1103.8 1785.2,1080.8 1795,1071 ; U1.12 1795,1071 ; U1.11 1845,1055 1835,1065 1801,1065 1795,1071
  Top Layer w20: R7.2 43,83 22,104 22,1521 130.01,1629.01 231.56,1629.01 262,1598.57 262,1584.4 203.6,1526 168,1526 152,1510 152,1493 131,1472 100,1472 85,1457 85,1353 130,1308 344,1308 370.8,1281.2 C19.1 370.8,1242.43 447.23,1166 461.57,1166 481.07,1146.5 U2.5 784.5,1146.5 836.5,1094.5 ; R7.2@93.6,83 93.6,22.4 211.21,22.4 229.8,41 v1(711,41) ; v1(771,191) v1(2435,191) 2446.4,191 R2.2 ; C18.1 787.6,757 805,774.4 U2.17 805,1006 ; 805,1025 805,1006 ; C21.1 864.6,1420.43 849.87,1420.43 836.5,1407.06 U2.38 836.5,1094.5 ; U4.22 U4.23 1595,1447.4 C24.1 ; U3.8 1576,871 1595,890 C23.1 1663.6,978.6 U1.14 1695,1115.2 1709.4,1129.6 C22.1 ; v1(1645,1492) 1645,1467.4 C24.1 ; C22.1@1703.8,1135.2 C22.1 ; v1(2100,1217) v1@2108,1217 ; R6.1 R5.2 ; J2.1 2653,1364 2624,1335 ; U6.4 2788.21,435.12 C17.1 v1(2910,881) v1(2795,996) ; J1.4 2850,1240 2755,1335 2624,1335 ; 805,1006 836.5,1037.5 836.5,1094.5 ; 836.5,1094.5 847.49,1083.5 U2.27 1150.5,1083.5 1171.4,1062.6 C20.1 1263.6,1062.6 1327,1126 1327,1208.57 1391.43,1273 1430.57,1273 1462,1304.43 1462,1351 1543.4,1432.4 C24.1 ; C22.1 1869.2,1135.2 1948,1214 2385.66,1214 2437.4,1265.74 R5.2 ; R5.2 2624,1335
  Bottom Layer w20: v1(711,41) 711,131 v1(771,191) ; v1(1645,1492) 1676,1461 2036,1461 2100,1397 v1(2100,1217) ; v1(2435,191) 2435,241 2466.56,272.56 2508,272.56 2607.99,372.54 2607.99,391.71 2847.1,630.83 2886.27,630.83 2910,654.56 v1(2910,881) ; J2.1 2653,1483 2750,1580 2972.78,1580 3005,1547.78 3005,1478 2952,1425 J1.7 ; J2.1@2675,1415 J2.1@2675,1427.78 ; v1(2795,996) 2795,1170 J1.4
WP: U2.20 U3.3 | length 466.1
  Top Layer w12: U2.20 899.49,800.51 902.47,797.53 903.73,797.53 925.99,775.27 925.99,774.01 940,760 1203.91,760 1214.91,771 U3.3
XTAL1: C9.2 U2.8 X1.1 | length 410.4
  Top Layer w12: X1.1 248.02,964.02 276.4,992.4 C9.2 376.4,992.4 436.01,1052.01 U2.8
XTAL2: C7.2 U2.7 X1.2 | length 437.5
  Top Layer w12: X1.2 181,1101 202.4,1079.6 C7.2 327.91,1083.5 U2.7
pads on no net: J1.6 J1.8 S1.3 S2.4 S3.4 S4.4 S5.4 S6.4 S7.4 S8.3 U1.9 U1.10 U1.13 U2.26 U2.30 U2.31 U2.32 U2.33 U2.34 U2.35 U2.36 U2.44

## Polygon pours and split planes (outlines as drawn)
GND on Top Layer "GND_L01_P079" (hatched 90Degree grid 8 track 10, remove dead copper, pour order 79): 3082,1066 2317,1066 2315,1064 2346,1033 2346,18 3078,18 3082,22
VBat on Top Layer "VBAT_L01_P077" (hatched 90Degree grid 8 track 10, pour order 77): 2705,110 2704,109 2588,109 2588,333 2586,335 2586.2,335.2 2702.2,335.2 2704,337 2705,336
"VCC 3.3V" on Top Layer "VCC_3.3V_L01_P075" (hatched 90Degree grid 8 track 10, pour order 75): 2766,525 2767,524 2767,418 2984,418 2986,420 2986,522 2771,522 2767,526
GND on Top Layer "GND_L01_P065" (hatched 90Degree grid 8 track 10, remove dead copper, pour order 65): 516,1718 510,1724 13,1724 15,1722 15,675 501,675 506,670 513,677 513,1720
"VCC 3.3V" on Top Layer "VCC_3.3V_L01_P071" (hatched 90Degree grid 8 track 10, pour order 71): 637,935 638,934 972,934 972,1282 969,1285 636,1285 636,939 635,938
GND on Bottom Layer "GND_L02_P067" (hatched 90Degree grid 8 track 10, remove dead copper, pour order 67): 11,1729 23,1717 3080,1717 3080,12 3084,8 11,8

## Other copper
Top Layer:
  rectangle net GND: 2680,360 2790,390

## Silkscreen, mask and mechanical layers (free items; w line width, h text height)
Top Overlay:
  text "Game Consol" at 570,1665 h40
  text "819595" at 1279.5,1655 h40
  text "Indunil" at 1653,1655 h40
  text "3.3V" at 2527,1303 h30
  text "+" at 2658,1296 h60
  text "+" at 2355,782 h60
Bottom Overlay:
  text "819595" at 922,1659 h40
  text "Indunil" at 1386.37,1659 h40
  text "Game Consoler" at 2084,1659 h40
Mechanical 1:
  the board outline again, w20

## Text inside footprints (layer, text, board x,y; h text height)
BT1: Top Overlay "-" at 302,420 h20; Top Overlay "+" at 2497.8,246.57 h20